# EAGLE board lt mikro workshop mask (EAGLE 7.6.0)
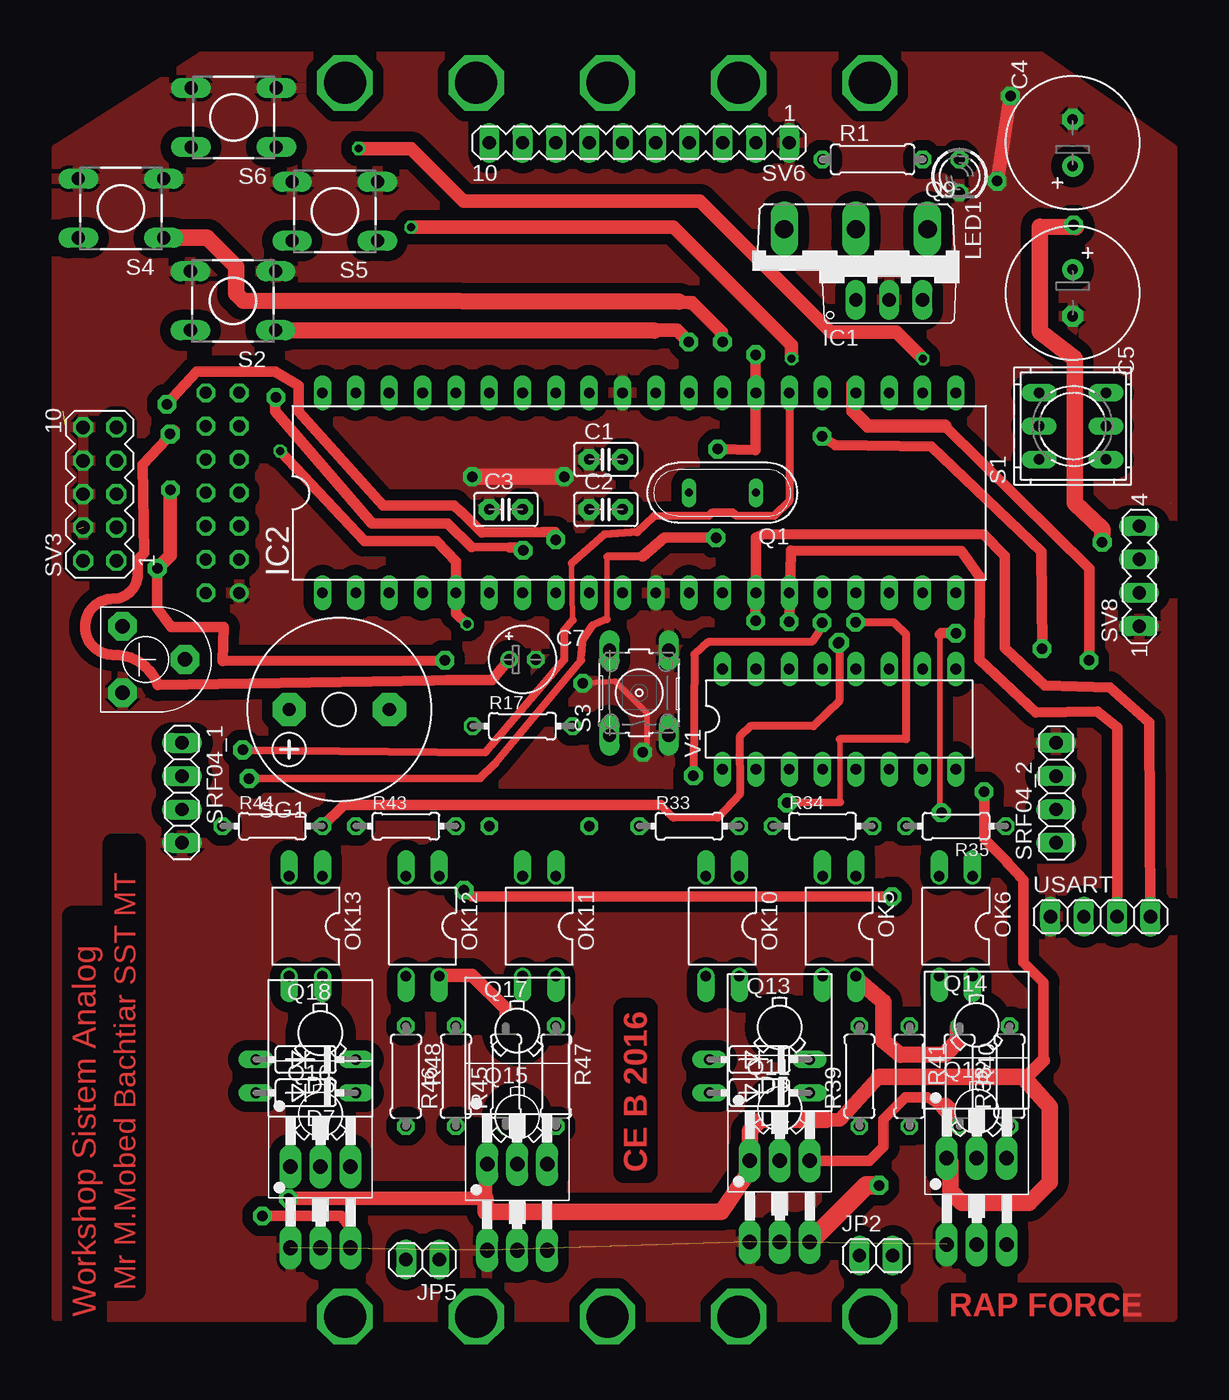
[diagram p0: board, top side]
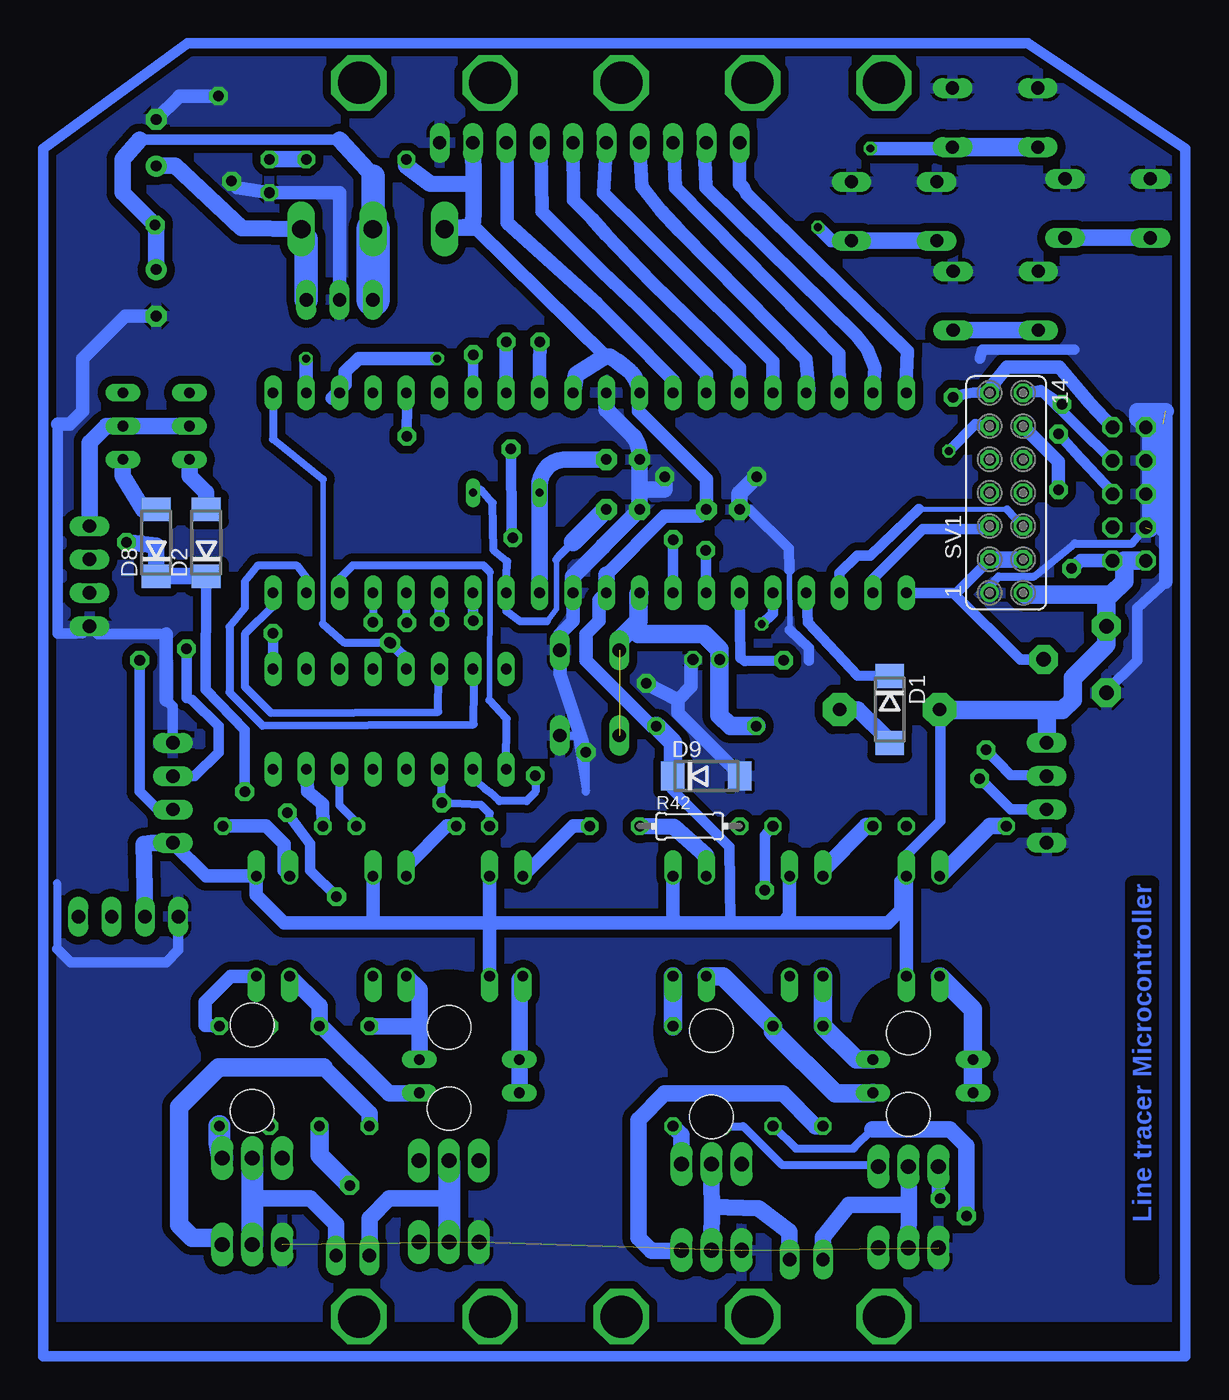
[diagram p1: board, bottom side, seen from below]

No outline drawn. Coordinates in mm, seen from the top.
Copper layers (1*16): Top 0.035mm / dielectric 1.5mm / Bottom 0.035mm
Design rules "default": minimum track width 10mil, minimum drill 24mil, track to track 8mil, track to pad 8mil, pad to pad 8mil, via to via 8mil, smd to smd 8mil, copper to edge 40mil, drill to drill 8mil, minimum pad ring 10mil, minimum via ring 8mil, stop-mask expansion 4mil, vias tented up to drill 0mil, thermal gap 10mil

## Footprints (pad centres in the part's own frame; a part is rotated, then mirrored left to right if it is on the bottom)
C2.5-2 = drill 0.813 pad 1.6 octagon: 1 -1.27,0; 2 1.27,0
E3,5-10 = drill 0.813 pad 1.6: + -1.778,0 | drill 0.813 pad 1.6 octagon: - 1.778,0
E2-5 = drill 0.813 pad 1.27: + -1.016,0 | drill 0.813 pad 1.27 octagon: - 1.016,0
DO214AA = smd 1.8 x 2.2: A 2.55,0; C -2.55,0
DO35-7 = drill 0.813 long: A 3.81,0; C -3.81,0
TO220V = drill 1.016 long: 1 -2.54,-2.54; 2 0,-2.54; 3 2.54,-2.54
DIL40 = drill 0.813 long: 1 -24.13,-7.62; 2 -21.59,-7.62; 3 -19.05,-7.62; 4 -16.51,-7.62; 5 -13.97,-7.62; 6 -11.43,-7.62; 7 -8.89,-7.62; 8 -6.35,-7.62; 9 -3.81,-7.62; 10 -1.27,-7.62; 11 1.27,-7.62; 12 3.81,-7.62; 13 6.35,-7.62; 14 8.89,-7.62; 15 11.43,-7.62; 16 13.97,-7.62; 17 16.51,-7.62; 18 19.05,-7.62; 19 21.59,-7.62; 20 24.13,-7.62; 21 24.13,7.62; 22 21.59,7.62; 23 19.05,7.62; 24 16.51,7.62; 25 13.97,7.62; 26 11.43,7.62; 27 8.89,7.62; 28 6.35,7.62; 29 3.81,7.62; 30 1.27,7.62; 31 -1.27,7.62; 32 -3.81,7.62; 33 -6.35,7.62; 34 -8.89,7.62; 35 -11.43,7.62; 36 -13.97,7.62; 37 -16.51,7.62; 38 -19.05,7.62; 39 -21.59,7.62; 40 -24.13,7.62
1X02 = drill 1.016 long: 1 -1.27,0; 2 1.27,0
LED3MM = drill 0.813 octagon: A -1.27,0; K 1.27,0
DIL04 = drill 0.813 offset: 1 -1.27,-3.81; 2 1.27,-3.81; 3 1.27,3.81; 4 -1.27,3.81
QS = drill 0.61 long: 1 -2.54,0; 2 2.54,0
TOP3AV = drill 1.397 long: B -5.461,-3.175; C 0,-3.175; E 5.461,-3.175
TO126 = drill 1.118 long: 1 -2.286,-5.08; 2 0,-5.08; 3 2.286,-5.08 | hole 3.302: 0,5.08
0207/7 = drill 0.813 octagon: 1 -3.81,0; 2 3.81,0
0204/7 = drill 0.813 octagon: 1 -3.81,0; 2 3.81,0
9077-2 = drill 0.813 long: 1 -2.54,2.54; 2 0,2.54; 3 2.54,2.54; 4 -2.54,-2.54; 5 0,-2.54; 6 2.54,-2.54
DTS-6 = drill 1 long: 1 -3.25,2.25; 2 3.25,2.25; 3 -3.25,-2.25; 4 3.25,-2.25
B3F-10XX = drill 1.016 long: 1 -3.251,2.261; 2 3.251,2.261; 3 -3.251,-2.261; 4 3.251,-2.261
F/CM12P = drill 1.016 pad 2.54 octagon: + 3.81,0; - -3.81,0
1X04 = drill 1.016 long: 1 -3.81,0; 2 -1.27,0; 3 1.27,0; 4 3.81,0
FE07-2 = drill 0.914: 1 -7.62,1.27 | drill 0.914 octagon: 2 -7.62,-1.27; 3 -5.08,1.27; 4 -5.08,-1.27; 5 -2.54,1.27; 6 -2.54,-1.27; 7 0,1.27; 8 0,-1.27; 9 2.54,1.27; 10 2.54,-1.27; 11 5.08,1.27; 12 5.08,-1.27; 13 7.62,1.27; 14 7.62,-1.27
MA05-2 = drill 1.016 octagon: 1 -5.08,-1.27; 2 -5.08,1.27; 3 -2.54,-1.27; 4 -2.54,1.27; 5 0,-1.27; 6 0,1.27; 7 2.54,-1.27; 8 2.54,1.27; 9 5.08,-1.27; 10 5.08,1.27
MA10-1 = drill 1.016 long: 1 -11.43,0; 2 -8.89,0; 3 -6.35,0; 4 -3.81,0; 5 -1.27,0; 6 1.27,0; 7 3.81,0; 8 6.35,0; 9 8.89,0; 10 11.43,0
MA04-1 = drill 1.016 long: 1 -3.81,0; 2 -1.27,0; 3 1.27,0; 4 3.81,0
TRIMPOT = drill 1.1 pad 2.184 octagon: 1 -2.538,1.271; 2 0,-3.5; 3 2.536,1.271
DIL16 = drill 0.813 long: 1 -8.89,-3.81; 2 -6.35,-3.81; 3 -3.81,-3.81; 4 -1.27,-3.81; 5 1.27,-3.81; 6 3.81,-3.81; 7 6.35,-3.81; 8 8.89,-3.81; 9 8.89,3.81; 10 6.35,3.81; 11 3.81,3.81; 12 1.27,3.81; 13 -1.27,3.81; 14 -3.81,3.81; 15 -6.35,3.81; 16 -8.89,3.81

## Placement (x,y rotation side)
C1  22pF  [C2.5-2]  42.85,67.31 0 top
C2  22pF  [C2.5-2]  42.85,63.5 0 top
C3  100nF  [C2.5-2]  35.23,63.5 0 top
C4  [E3,5-10]  78.41,91.44 90 top
C5  [E3,5-10]  78.41,80.01 270 top
C7  10uF  [E2-5]  36.5,52.07 0 top
D1  [DO214AA]  22.53,48.26 270 bottom
D2  [DO214AA]  74.6,60.96 90 bottom
D4  1N4148DO35-7  [DO35-7]  54.55,19.05 180 top
D5  1N4148DO35-7  [DO35-7]  54.55,21.59 180 top
D6  1N4148DO35-7  [DO35-7]  19.99,21.59 180 top
D7  1N4148DO35-7  [DO35-7]  19.99,19.05 180 top
D8  [DO214AA]  78.41,60.96 90 bottom
D9  [DO214AA]  36.5,43.18 0 bottom
IC1  7805TV  [TO220V]  64.44,82.01 0 top
IC2  MEGA16-P  [DIL40]  45.39,64.77 0 top
JP2  [1X02]  63.44,6.65 0 top
JP5  [1X02]  28.88,6.35 180 top
LED1  [LED3MM]  69.79,88.9 270 top
OK5  LTV816  [DIL04]  60.63,31.75 180 top
OK6  LTV816  [DIL04]  69.52,31.75 180 top
OK10  LTV816  [DIL04]  51.74,31.75 180 top
OK11  LTV816  [DIL04]  37.77,31.75 180 top
OK12  LTV816  [DIL04]  28.88,31.75 180 top
OK13  LTV816  [DIL04]  19.99,31.75 180 top
Q1  11.0592MHz  [QS]  51.74,64.77 180 top
Q9  TIP3055  [TOP3AV]  61.9,81.68 180 top
Q11  BD139  [TO126]  56.1,12.77 0 top
Q12  BD139  [TO126]  71.1,12.58 0 top
Q13  BD140  [TO126]  56.1,18.96 0 top
Q14  BD140  [TO126]  71.1,19.15 0 top
Q15  BD139  [TO126]  36.1,12.14 0 top
Q16  BD139  [TO126]  21.1,12.33 0 top
Q17  BD140  [TO126]  36.1,18.71 0 top
Q18  BD140  [TO126]  21.1,18.52 0 top
R1  [0207/7]  63.17,90.17 0 top
R17  10K  [0204/7]  36.5,46.99 0 top
R33  1K  [0204/7]  49.2,39.37 0 top
R34  1K  [0204/7]  59.36,39.37 0 top
R35  1K  [0204/7]  69.52,39.37 180 top
R38  [0207/7]  73.6,20.32 90 top
R39  [0207/7]  62.17,20.32 90 top
R40  [0207/7]  69.79,20.32 270 top
R41  [0207/7]  65.98,20.32 270 top
R42  1K  [0204/7]  37.77,39.37 0 bottom
R43  1K  [0204/7]  27.61,39.37 0 top
R44  1K  [0204/7]  17.45,39.37 0 top
R45  [0207/7]  35.23,20.32 90 top
R46  [0207/7]  31.42,20.32 90 top
R47  [0207/7]  39.04,20.32 270 top
R48  [0207/7]  27.61,20.32 270 top
S1  9077-2  [9077-2]  78.41,69.85 90 top
S2  DTS-6  [DTS-6]  14.45,79.4 180 top
S3  [B3F-10XX]  45.39,49.53 90 top
S4  DTS-6  [DTS-6]  5.91,86.44 180 top
S5  DTS-6  [DTS-6]  22.19,86.22 180 top
S6  DTS-6  [DTS-6]  14.49,93.36 180 top
SG1  F/CM12P  [F/CM12P]  22.53,48.26 180 top
SRF04_1  [1X04]  10.56,41.91 270 top
SRF04_2  [1X04]  77.14,41.91 90 top
SV1  LCD 8x2  [FE07-2]  13.64,64.77 90 bottom
SV3  ISP  [MA05-2]  4.29,64.67 90 top
SV6  [MA10-1]  45.39,91.44 180 top
SV8  [MA04-1]  83.49,58.42 90 top
U$1  TRIMPOT  [TRIMPOT]  7.29,52.07 90 top
USART  [1X04]  80.54,32.47 0 top
V1  74139N  [DIL16]  60.63,47.53 0 top

## Library data of the parts
C1-C3 = capacitor-wima
C4 C5 C7 = rcl
D1 D2 D4-D9 = diode
IC1 = linear
IC2 = atmel
JP2 JP5 SRF04_1 SRF04_2 USART = pinhead
LED1 = led
OK5 OK6 OK10-OK13 = optocoupler
Q1 = special
Q9 = transistor-power
Q11 Q12 Q15 Q16 = transistor-npn
Q13 Q14 Q17 Q18 = transistor-pnp
R1 R17 R33-R35 R38-R48 = resistor
S1 = switch-misc
S2 S4-S6 = switch-tact
S3 = switch-omron
SG1 = buzzer
SV1 = con-lsta
SV3 SV6 = con-lstb
SV8 = con-lstb; OC_FARNELL: unknown; OC_NEWARK: unknown
U$1 = trimpot
V1 = 74ttl-din

## Nets
+UB: V1.16
-UB: V1.8
GND: C1.1 C2.1 C3.1 C4.- C5.- C7.- D9.A IC1.2 IC2.11 IC2.31 LED1.K Q11.1 Q12.1 Q15.1 Q16.1 S2.3 S2.4 S3.3 S3.4 S4.3 S4.4 S5.3 S5.4 S6.3 S6.4 SRF04_1.4 SRF04_2.4 SV1.1 SV3.4 SV3.6 SV3.8 SV3.10 SV6.1 SV8.1 U$1.1 USART.1
MISO: IC2.7 SV1.13 SV3.9
MOSI: IC2.6 SV1.12 SV3.1
N$2: LED1.A R1.2
N$3: D8.A S1.4
N$4: D1.C IC2.4
N$5: SV1.8
N$6: SV1.10
N$7: SV1.7
N$9: C2.2 IC2.13 Q1.1
N$10: C1.2 IC2.12 Q1.2
N$11: D2.A S1.1
N$14: OK10.2 R33.1
N$17: OK5.2 R34.1
N$18: OK6.2 R35.1
N$19: C4.+ IC1.3 Q9.B
N$21: JP2.1 Q11.2 Q13.2
N$22: S1.2 S1.5 SV8.4
N$23: SV1.9
N$24: JP2.2 Q12.2 Q14.2
N$25: Q13.3 R40.2
N$26: Q14.3 R38.1
N$27: Q12.3 R39.1
N$48: R35.2 V1.7
N$49: R34.2 V1.6
N$50: Q11.3 R41.2
N$52: IC2.40 SV6.10
N$53: IC2.33 SV6.3
N$54: IC2.34 SV6.4
N$55: IC2.35 SV6.5
N$56: IC2.36 SV6.6
N$57: IC2.37 SV6.7
N$58: D1.A SG1.-
N$59: OK5.4 R40.1
N$60: IC2.38 SV6.8
N$61: IC2.39 SV6.9
N$62: D5.C OK5.3 R39.2
N$63: OK6.4 R38.2
N$64: D4.C OK6.3 R41.1
N$65: D4.A D5.A OK10.3
N$66: OK12.2 R43.1
N$67: OK11.2 R42.1
N$68: OK13.2 R44.1
N$70: R43.2 V1.9
N$71: R42.2
N$72: JP5.1 Q15.2 Q17.2
N$73: JP5.2 Q16.2 Q18.2
N$74: Q17.3 R47.2
N$75: Q18.3 R45.1
N$76: Q16.3 R46.1
N$77: Q15.3 R48.2
N$78: OK11.4 R47.1
N$79: D7.C OK11.3 R46.2
N$80: OK12.4 R45.2
N$81: D6.C OK12.3 R48.1
N$82: D6.A D7.A OK13.3
PB0: IC2.1 SV1.3 SV1.4 U$1.2
PB1: IC2.2 SV1.5
PB2: IC2.3 SV1.6
PB4: IC2.5 SV1.11
PC0: IC2.22 S6.1 S6.2
PC1: IC2.23 S5.1 S5.2
PC2: IC2.24 SRF04_2.2
PC3: IC2.25 SRF04_2.3
PC4: IC2.26 SRF04_1.2
PC5: IC2.27 SRF04_1.3
PC6: IC2.28 S4.1 S4.2
PC7: IC2.29 S2.1 S2.2
PD0: IC2.14 USART.4
PD1: IC2.15 USART.3
PD2: IC2.16 V1.2
PD3: IC2.17 R33.2 V1.3
PD4: IC2.18 V1.1
PD5: IC2.19 V1.15
PD6: IC2.20 V1.14
PD7: IC2.21 R44.2 V1.13
RESET: C7.+ IC2.9 R17.1 S3.1 S3.2 SV3.5
SCK: IC2.8 SV1.14 SV3.7
VCC: C3.2 D9.C IC2.10 IC2.30 IC2.32 OK5.1 OK6.1 OK10.1 OK10.4 OK11.1 OK12.1 OK13.1 OK13.4 Q9.E R1.1 R17.2 SG1.+ SRF04_1.1 SRF04_2.1 SV1.2 SV3.2 SV6.2 U$1.3 USART.2
VCC2: C5.+ D2.C D8.C IC1.1 Q9.C Q13.1 Q14.1 Q17.1 Q18.1

## Tracks (layer width: path | path; a pad name or v marks a point on that pad's centre or on a via)
GND  (via drill 0.8 pad 1.42)  (6 unrouted)
  Top 0.406: v41.08,50.25 43.56,50.44 46,48 46,45
  Top 1.016: v72.67,88.51 v73.67,95
  Top 1.27: v32.67,66 v39.67,66
  Bottom 0.406: 30.14,54.31 30.16,58.89
  Bottom 0.61: SV1.1 14.91,57.67 14.22,58.39 11.51,58.39 8.42,60.91 4.04,60.91 SV3.4 | 85.96,35.03 85.96,30.03 | S3.3 46.39,46.28 45.67,42 v45.67,45
  Bottom 0.813: U$1.1 6.02,49.65 3.67,52 3.67,56 1.47,57.96 | 8.47,75.69 15.47,75.69 15.67,75 | 28.67,52 28.67,52.93 30.14,54.31 | 30.16,58.89 30.21,60.52 33.2,63.5 C3.1 | SRF04_2.4 77.14,48.47 77.67,49 | 77.67,54 82.88,54 SV8.1 84.05,54.05 85.9,54.05 85.9,64 | USART.1 76.72,29.94 77.67,29 84.94,29 85.96,30.03 | 85.9,63.99 85.9,70
  Bottom 1.016: IC1.2 64.44,87.63 LED1.K 72.25,88 v72.67,88.51 | IC2.11 46.67,55 47.65,54.02 S3.4 47.65,50.98 v45.67,45 | v41.08,50.25 38.67,49 | 38.67,49 37.67,50 37.67,51.91 C7.- | D9.A 33.95,43.28 38.67,48 38.67,49 | v73.67,95 76.67,95 76.67,94.96 C4.- | 1.47,57.96 1.49,70.98 | 77.67,49 77.67,54 | 85.9,70 85,70 84,71 84,75 80.77,78.23 C5.-
  Bottom 1.27: 41.58,65 C1.1 41.58,67.75 arc-45 42.16,69.16 44.12,71.12 IC2.31 | 41.58,65 C2.1 44.37,60.71 44.37,60.68 46.66,58.39 IC2.11 | C3.1 33.96,64.71 v32.67,66 | v39.67,66 39.67,65 41.58,65 | 1.49,70.98 3.67,71 3.67,70.41 SV3.10 | 2.67,70 2.67,62 | 1.67,70 1.67,62
  pour Bottom (isolate 0.61): 11,99 78,99 86,90 86,2 1,2 0,4 0,90
  pour Top (isolate 0.813): 12,98 76,98 86,91 86,2 1,2 1,91
MISO  (via drill 0.8 pad 1.42)
  Top 0.7: 35.55,60.61 32.63,60.62
  Top 0.813: v36.55,60.38 36.36,60.59 35.55,60.61 | 32.63,60.62 30.79,62.43 25.05,62.43 17.67,71 v17.7,72.04
  Bottom 0.813: IC2.7 36.54,59.34 v36.55,60.38 | v17.7,72.04 16.68,72.34 16.1,72.42 14.94,72.42 SV1.13
  Bottom 1.016: SV3.9 7.29,71.62 9.59,74.35 13.59,74.35 14.67,73 14.67,72.63 SV1.13
MOSI  (via drill 0.8 pad 1.42)
  Top 0.813: v8.67,59 8.67,56 9.75,54.53 13.74,54.53 13.67,51.94 v30.59,52
  Top 1.016: v8.67,59 9.67,60 v9.67,65
  Bottom 0.813: IC2.6 33.88,52.18 33.56,51.94 v30.59,52
  Bottom 1.016: SV3.1 7.95,59.6 v8.67,59 | v9.67,65 9.67,67.15 SV1.12
N$2
  Bottom 1.27: R1.2 LED1.A
N$3
  Bottom 1.27: D8.A 79.42,63.51 80.95,66.04 S1.4
N$4
  Bottom 0.813: D1.C 24.98,50.84 28.77,54.88 28.86,57.13 IC2.4
N$8  (via drill 3.2)
  other vias: 52.97,96
N$9
  Bottom 0.406: 47.92,59.68 47.92,55.9 48.63,54.97
  Bottom 0.61: 46.67,61 47.67,60 47.92,59.68 | 48.63,54.97 50.66,54.97 51.72,55.74 51.74,56.5 IC2.13 51.67,59.55 52.71,60.38 52.77,64 53.67,65 54.05,65 Q1.1
  Bottom 1.422: C2.2 44.17,63.5 46.67,61
N$10
  Bottom 1.27: IC2.12 Q1.2 49.2,65.31 arc90 47.2,67.31 C1.2
N$11
  Bottom 1.27: D2.A 74.6,64.77 75.87,66.04 S1.1
N$12  (via drill 3.2)
  other vias: 22.97,96
N$13  (via drill 3.2)
  other vias: 42.97,96
N$14
  Bottom 1.016: R33.1 46.66,39.37 OK10.2
N$15  (via drill 3.2)
  other vias: 32.97,96
N$16  (via drill 3.2)
  other vias: 62.97,96
N$17
  Bottom 1.016: R34.1 56.3,39.37 59.2,36.47 59.31,36.12 OK5.2
N$18
  Bottom 1.016: R35.1 70.04,39.37 68.67,38 68.67,35.98 OK6.2
N$19
  Bottom 1.27: 66.98,84.07 Q9.B 71.9,84.93 76.95,89.68 78.06,89.71 C4.+
  Bottom 1.778: IC1.3 66.98,84.07
N$20  (via drill 3.2)
  other vias: 32.97,2
N$21
  Bottom 1.27: JP2.1 62.17,9.5 60.67,11 56.1,11
  Bottom 1.676: Q13.2 56.1,11 Q11.2
N$22
  Bottom 1.27: SV8.4 83.49,68.58 82.22,69.85 S1.5 S1.2
N$24
  Bottom 1.27: JP2.2 64.71,9.04 66.67,11 71.1,11
  Bottom 1.676: Q14.2 71.1,11 Q12.2
N$25
  Top 0.813: 68.67,18 68.44,18 67.34,18.7 66.32,18.7 65.89,18.7 65.66,18.7 64,17.04 64,14.93 62.93,13.86 58.41,13.86 Q13.3
  Top 1.422: R40.2 69.79,16.88 68.67,18
N$26
  Bottom 1.676: R38.1 73.6,15.28 Q14.3
N$27
  Bottom 1.27: R39.1 62.17,17.5 65.67,21
  Bottom 1.422: 65.67,21 73.67,21 76.67,18 76.67,9 75.67,8 73.89,8 Q12.3
N$28  (via drill 3.2)
  other vias: 22.97,2
N$29  (via drill 3.2)
  other vias: 42.97,2
N$30  (via drill 3.2)
  other vias: 52.97,2
N$31  (via drill 3.2)
  other vias: 62.97,2
N$32
  Bottom 0.813: 12,99 76,99 87,91 87,-1 0,-1 0,91 12,99
N$48
  Bottom 1.016: R35.2 65.74,41.05 66.89,42.03 66.94,43.69 V1.7
N$49
  Bottom 0.61: R34.2 63.17,39.68 64.44,40.95 V1.6
N$50  (via drill 0.8 pad 1.42)
  Top 1.422: v63.67,12 62.7,12 Q11.3
  Bottom 1.422: R41.2 65.98,14.31 v63.67,12
N$52
  Bottom 1.016: SV6.10 33.96,88.29 33.67,88 33.39,87.51 21.17,75.56 21.29,72.89 IC2.40
N$53
  Bottom 1.016: IC2.33 39.04,73.37 42.67,77 44.79,79.16 51.67,85.36 51.67,91.37 SV6.3
N$54
  Bottom 1.016: IC2.34 36.5,73.83 41.67,79 44.43,81.63 49.03,86.17 49.07,90.91 SV6.4
N$55
  Bottom 1.016: IC2.35 33.96,74.29 40.69,80.83 44.1,84.41 45.26,85.7 46.62,87.07 SV6.5
N$56
  Bottom 1.016: IC2.36 31.42,74.75 39.67,83 41.33,84.61 44.31,87.61 SV6.6
N$57
  Bottom 1.016: SV6.7 41.41,88.1 40.01,86.29 38.52,84.7 28.89,74.96 28.67,72.6 IC2.37
N$58
  Bottom 1.27: SG1.- 24.93,48.26 22.67,46 22.67,45.85 D1.A
N$59
  Top 1.27: OK5.4 61.9,27.77 63.99,26 63.99,23 65.27,21.96 68.67,22 69.67,23 69.67,24.01 R40.1
N$60
  Bottom 1.016: IC2.38 26.4,75.39 38.85,88.01 38.97,90.72 SV6.8
N$61
  Bottom 1.016: IC2.39 23.66,74.25 24.23,75.68 25.07,76.73 36.52,88.02 36.62,91.27 SV6.9
N$62
  Bottom 1.27: D5.C 58.36,24 | 58.36,24 58.36,26.94 OK5.3 | R39.2 58.49,24.13 58.36,24
N$63
  Bottom 1.016: OK6.4 72.73,27.94 74.67,26 74.67,24.2 R38.2
N$64
  Bottom 1.27: 58.31,19 60.67,19 65.8,24.13 R41.1 65.98,25.67 OK6.3 | 57.67,19 58.31,19 | 58.31,19 D4.C
N$65
  Bottom 1.27: D4.A D5.A 50.74,27.67 OK10.3
N$66
  Bottom 1.27: R43.1 24.3,39.37 27.67,36 27.67,35.62 OK12.2
N$67
  Bottom 1.27: R42.1 38.98,39.3 36.52,37.15 36.44,35.69 OK11.2
N$68
  Bottom 1.27: R44.1 14.91,39.37 OK13.2
N$70  (via drill 0.8 pad 1.42)
  Top 0.406: 68.3,53.96 68.3,40.44
  Top 0.813: v64.67,34 32.67,34 v32.04,34.48 | v69.52,54.07 68.42,54.07 68.3,53.96 | 68.3,40.44 v68.42,40.39
  Bottom 0.813: v68.42,40.39 66.67,38 66.67,36 v64.67,34 | v32.04,34.48 32.04,38.65 R43.2 | V1.9 v69.52,54.07
N$72
  Bottom 1.27: JP5.1 30.15,8.48 32.51,10.26 36.07,10.35 | 36.07,10.35 36.09,12.1 Q17.2 | 36.07,10.35 36.09,7.62 Q15.2
N$73
  Bottom 1.27: Q18.2 21.08,10.53 | 21.08,10.53 Q16.2 | JP5.2 27.61,8.06 25.65,10.53 21.08,10.53
N$74
  Bottom 1.27: Q17.3 38.38,15.86 R47.2
N$75
  Bottom 0.61: R45.1 33.68,16.51 30.72,13.55 23.5,13.55 Q18.3
N$76  (via drill 0.8 pad 1.42)
  Top 0.813: v16.68,9.66 22.68,9.66 23.4,8.72 23.4,7.25
  Top 1.27: 23.4,7.25 Q16.3
  Bottom 0.61: R46.1 31.38,16.51 29.68,14.82 25.28,14.82 25.21,14.88 25.21,14.93 23.86,16.28
  Bottom 1.27: 23.86,16.28 17.95,16.28 16.67,15 16.67,11.19 v16.68,9.66
N$77
  Bottom 1.27: R48.2 28.18,16.51 30.67,19 39.67,19 41.67,17 41.67,8 40.67,7 38.45,7 Q15.3
N$78
  Bottom 1.422: OK11.4 R47.1
N$79
  Bottom 1.422: OK11.3 35.23,27.94 R46.2 31.42,23.75 26.67,19 23.85,19 D7.C
N$80
  Top 1.016: R45.2 35.23,25.44 32.67,28 30.21,28 OK12.4
N$81
  Bottom 1.422: OK12.3 R48.1 25.07,21.59 D6.C
N$82
  Bottom 1.422: OK13.3 16.18,25.4 D6.A D7.A
PB0
  Bottom 0.813: IC2.1 17.67,57.15 | 17.67,57.15 17.45,57.15 SV1.3 | U$1.2 12.59,52.07 17.67,57.15
  Bottom 1.27: SV1.3 SV1.4
PB1
  Bottom 0.813: IC2.2 23.8,58.2 20,62 15.14,62 SV1.5
PB2
  Bottom 0.406: 20.32,63.53 13.59,63.5
  Bottom 0.61: 13.59,63.5 12.98,62.85 SV1.6
  Bottom 0.813: IC2.3 26.34,58.66 25,60 24,60 20.32,63.53
PB4  (via drill 0.6)
  Top 0.813: v32.27,54.76 31.42,55.56 31.42,59.54 29.93,61.08 24.48,61.1 v18.03,67.95
  Bottom 0.813: IC2.5 31.42,55.58 v32.27,54.76 | v18.03,67.95 16,70 SV1.11
PC0  (via drill 0.6)
  Top 1.016: v67,75 65,77 60,77 50,87 32,87 28,91 v24,91
  Bottom 1.016: IC2.22 66.98,74.98 v67,75 | v24,91 17.85,91 S6.1
  Bottom 1.422: S6.2 S6.1
PC1  (via drill 0.6)
  Top 1.016: v28,85 48,85 57,76 v57,75
  Bottom 1.016: S5.1 26.97,83.97 v28,85 | v57,75 63,75 64,74 64,73 65,72 64.83,72 IC2.23
  Bottom 1.27: S5.2 S5.1
PC2  (via drill 0.8 pad 1.42)
  Top 0.813: v79.67,52 79.67,59 68.67,69.84
  Top 1.016: 68.67,69.84 62.83,69.84 61.67,71 61.67,72.62 | 61.67,73 61.67,72.62 | 61.67,72.62 IC2.24
  Bottom 0.813: SRF04_2.2 78.31,40.64 79.67,42 v79.67,52
PC3  (via drill 0.8 pad 1.42)
  Top 0.813: v76.1,52.89 76.03,60.29 67.67,68.3 60.36,68.41 v59.32,69.06
  Bottom 0.813: SRF04_2.3 75.49,43.18 73.67,45 73.67,47 75.67,49 76.1,49.12 v76.1,52.89 | v59.32,69.06 59.28,71.73 IC2.25
PC4  (via drill 0.8 pad 1.42)
  Top 0.406: 40.25,59.38 40.31,55.06
  Top 0.61: v15.18,45.18 33.67,45 39.69,52.05 39.7,54.2 39.64,54.26 40.1,54.84 40.31,55.06 | IC2.26 56.82,64.15 55.67,63 52.81,63 52.56,63.25 50.92,63.25 50.67,63 47.67,63 47.45,62.97 | 40.25,59.38 42.74,61.59 45.25,61.77 46.51,62.96 47.32,63 47.45,62.97 | 47.52,63 47.45,62.97
  Bottom 0.813: SRF04_1.2 13.31,43.27 v15.18,45.18
PC5  (via drill 0.8 pad 1.42)
  Top 0.406: 42.94,59.91 42.92,55.14
  Top 0.61: v15.67,43 33.28,43.03 34.41,44.13 40.96,52 40.98,52.59 41.03,53.5 41.8,54.65 42.92,55.14 | 45.62,59.9 42.94,59.91
  Top 0.813: v54.26,75.29 54.26,68.03 v51.38,68.1 | v51.24,61.34 47.33,61.34 45.62,59.9
  Bottom 0.813: SRF04_1.3 13.31,40.64 v15.67,43 | IC2.27 54.28,75.27 v54.26,75.29 | v51.38,68.1 51.34,61.79 v51.24,61.34
PC6  (via drill 0.8 pad 1.42)
  Top 1.016: 48.43,79.31 49.17,79.27 49.4,79.27 51.67,77 51.67,76.34 v51.73,76.28
  Top 1.27: S4.1 12.48,84.19 14.67,82 14.67,79.93 15.2,79.41 48.43,79.31
  Bottom 1.016: IC2.28 51.74,75.93 51.73,75.98 v51.73,76.28
  Bottom 1.27: S4.1 S4.2
PC7  (via drill 0.8 pad 1.42)
  Top 1.016: 46.55,77.1 46.52,77.15 48.28,77.15 v49.17,76.26
  Top 1.27: S2.1 46.55,77.1
  Bottom 1.016: IC2.29 49.2,74.47 v49.17,76.26
  Bottom 1.27: S2.2 S2.1
PD0  (via drill 0.8 pad 1.42)
  Top 0.813: v54.26,55.03 54.29,61.36 54.86,61.62 71.64,61.58 73.23,59.93 73.23,52.93 76.3,50.1 81.24,49.95 84.27,47.27 USART.4
  Bottom 0.813: IC2.14 v54.26,55.03
PD1  (via drill 0.8 pad 1.42)
  Top 0.813: v56.83,54.93 56.94,60.35 69.92,60.33 71.33,58.35 71.31,52.08 75.61,48.04 80.29,48.11 81.81,46.87 81.82,43.31 USART.3
  Bottom 0.813: IC2.15 v56.83,54.93
PD2  (via drill 0.8 pad 1.42)
  Top 0.61: v59.32,54.87 59.32,54.55 58.55,53.41 50.65,53.38 49.6,52.46 v49.52,43.2
  Bottom 0.61: IC2.16 59.36,54.91 v59.32,54.87 | v49.52,43.2 49.53,41.99 50.18,41.28 52.26,41.28 53.01,41.97 53.32,42.19 54.24,42.97 54.26,42.98 V1.2
PD3  (via drill 0.8 pad 1.42)
  Top 0.406: 60.67,46 60.7,41.18
  Top 0.61: v61.89,54.91 64.76,54.91 65.71,54 65.71,46 60.67,46 | 60.7,41.18 v56.66,41.14
  Bottom 0.61: IC2.17 v61.9,54.92 v61.89,54.91 | V1.3 56.67,43.57 v56.66,41.14 53.67,41 53.01,40.34 R33.2
PD4
  Bottom 0.406: 53.02,48.97 52.99,58.71
  Bottom 0.61: V1.1 51.71,47.57 53.02,48.97 | 52.99,58.71 53.47,59.23 63.44,59.23 64.67,58 64.67,57.38 IC2.18
PD5
  Bottom 0.61: IC2.19 66.98,58.31 67.69,59.22 70.69,59.22 71.67,58 71.67,56 72.83,54.57 72.83,49.57 70.3,47.04 54.22,47.12 54.2,49.96 54.2,51.21 V1.15
PD6
  Bottom 0.61: IC2.20 69.52,56.15 71.67,54 71.67,50 69.67,48 56.93,48.08 56.9,50.88 56.9,51.37 V1.14
PD7  (via drill 0.8 pad 1.42)
  Top 0.61: 60.67,53.19 v60.55,53.31 | v60.64,53.36 60.64,48.9 58.67,47 53.85,47 53.04,46.19 53.06,41.8 51.38,40.02 48.01,40 47.01,41
  Top 0.813: 47.01,41 22.89,41 R44.2
  Bottom 0.406: 65.7,65.79 65.71,54.77
  Bottom 0.61: IC2.21 69.52,68.85 65.7,65.79 | 65.71,54.77 64.1,53.37 60.6,53.37 v60.55,53.31 60.67,53.2 59.82,52.69 59.82,52.66 59.27,52.12 59.27,51.42 V1.13
  Bottom 0.813: 59.27,51.42 59.28,52.2 59.41,52.2 v60.64,53.36
RESET  (via drill 0.8 pad 1.42)  (1 unrouted)
  Top 0.813: v9.65,69.24 9.99,69.49 7.54,66.93 7.67,60.17 7.47,59.98 | 7.47,59.98 | 7.47,59.98 7.18,59.68 7.18,58.57 arc-90 5.31,56.7 arc180 5.31,52.42 arc-71 8.71,50.12 29.67,50.48 30.76,50.5 34.17,50.5 C7.+
  Bottom 0.813: SV3.5 5.55,64.81 7.87,67.3 7.99,67.41 v9.65,69.24
  Bottom 1.422: R17.1 34.67,47 35.48,47.81 C7.+ 35.48,52.81 36.67,54 41.67,54 42.17,54.5 | S3.2 43.13,53.54 42.17,54.5 | 42.17,54.5 41.67,55 41.67,57.06 IC2.9
SCK  (via drill 0.8 pad 1.42)
  Top 0.813: v39.03,61.2 38.98,61.76 38.02,61.77 33.42,61.74 31.87,63.29 31.82,63.29 31.3,63.8 25.87,63.8 19.43,70.94 19.43,72.94 17.67,74 11.67,74 v9.4,71.51
  Bottom 0.813: IC2.8 39.04,59.46 v39.03,61.2 | v9.4,71.51 11.02,72.58 SV1.14 10.84,72.44 SV3.7
VCC
  Bottom 0.813: OK13.1 21.26,37.17 18.67,39.76 18.67,48.21 SG1.+ | D9.C 39.1,42.16 34.72,37.78 34.67,32
  Bottom 1.016: Q9.E 54.01,84.86 44.19,75.17 | SRF04_2.1 74.6,35.56 OK6.1 70.79,34.12 68.67,32 61.67,32 | 61.67,32 52.67,32 | 52.67,32 38.67,32 | 38.67,32 34.67,32 30.67,32 | 30.67,32 22.67,32 21.67,33 21.67,35.15 OK13.1 OK13.4 | OK5.1 61.9,32.23 61.67,32 | OK10.1 53.01,32.34 52.67,32 | OK10.4 53.01,31.66 52.67,32 | OK11.1 39.04,32.37 38.67,32 | OK12.1 30.15,32.52 30.67,32 | R17.2 40.66,46.99 45.67,52 45.67,54 44.67,55 44.67,56.6 IC2.10 | IC2.32 41.67,72.3 41.67,71 36.5,65.83 C3.2 37,63 39.67,63 44.12,58.55
  Bottom 1.27: IC2.32 41.58,72.61 arc-45 42.76,74.38 43.31,74.81 43.84,75.15 44.19,75.17 46.43,73.76 IC2.30 | SRF04_2.1 78.77,38.1 79.37,38 79.34,36.39 USART.2 | SV6.2 54.25,88.27 | 54.25,88.27 54.22,88.08 54.24,86 54.31,85.07 Q9.E | R1.1 59.36,89.69 57.56,88.34 54.25,88.27 | IC2.10 44.12,58.55 | 36.67,63.33 C3.2
  Bottom 1.422: D9.C 39.05,45.73 R17.2 | SV1.2 12.22,57 5.67,57 | 5.67,57 6.02,56.65 U$1.3 6.02,53.22 8.59,50.66 8.59,49 9.37,48.21 10.67,48.21 | 5.67,57 4.67,58 4.67,59.61 SV3.2 | 18.67,48.21 10.67,48.21 | SRF04_1.1 10.56,48.1 10.67,48.21
VCC2  (via drill 0.8 pad 1.42)
  Top 0.813: v71.67,42 71.67,38.39 73.43,36.62 73.43,36.56 74.41,35.58 74.41,35.52 74.67,35.26 74.67,29 76.19,27.47 76.19,21.51
  Top 1.016: 33.67,13.77 33.67,11 v18.67,11 | 33.67,14 33.67,13.77 | 33.67,13.77 Q17.1 | 59.67,17 60.67,17 63.65,20.25 | 76.19,21.51 74.78,20.1
  Top 1.27: 33.67,11 33.67,10 51.67,10 53.81,13.14 Q13.1 53.81,16.14 54.67,17 59.67,17 | 63.65,20.25 74.65,20.25 74.78,20.1 76.67,18 76.67,12.25 75.11,10.68 69.99,10.68 69.09,11.58 69.09,13.79 Q14.1 | v78.49,85.17 78.67,85 75.92,85.05 75.92,77.05 78.56,75 78.56,64 80.67,62 v80.67,61
  Bottom 0.813: 79.68,91.67 64.44,91.67 | D2.C 74.64,49.77 71.67,46.69 v71.67,42
  Bottom 1.016: Q18.1 18.81,11.14 v18.67,11
  Bottom 1.27: D2.C D8.C 78.41,60.74 v80.67,61 | C5.+ 78.41,85.09 v78.49,85.17 80.95,87.63 80.95,90.17 79.68,91.67 | 64.44,91.67 61.9,88.9
  Bottom 1.778: 61.9,88.9 61.9,83.82
  Bottom 2.54: IC1.1 61.9,83.82 Q9.C

## Text on the board
Top: CE B 2016 | Mr M.Mobed Bachtiar SST MT | Workshop Sistem Analog | RAP FORCE
Bottom: Line tracer Microcontroller